# EAGLE board YaoGuai_SOUND (beta) (EAGLE 8.1.1)
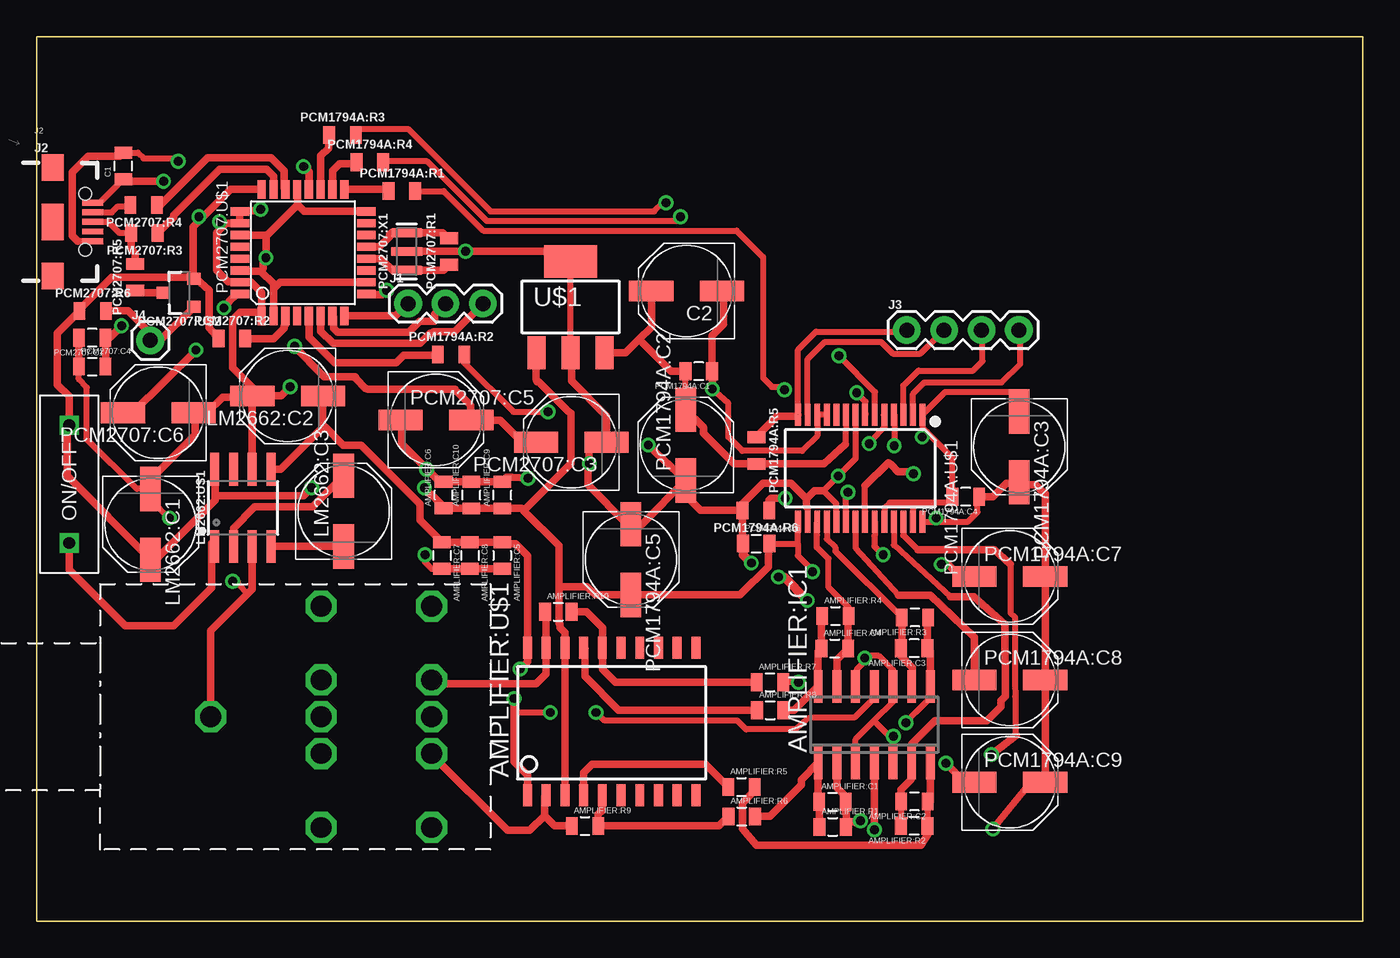
[diagram p0: board, top side]
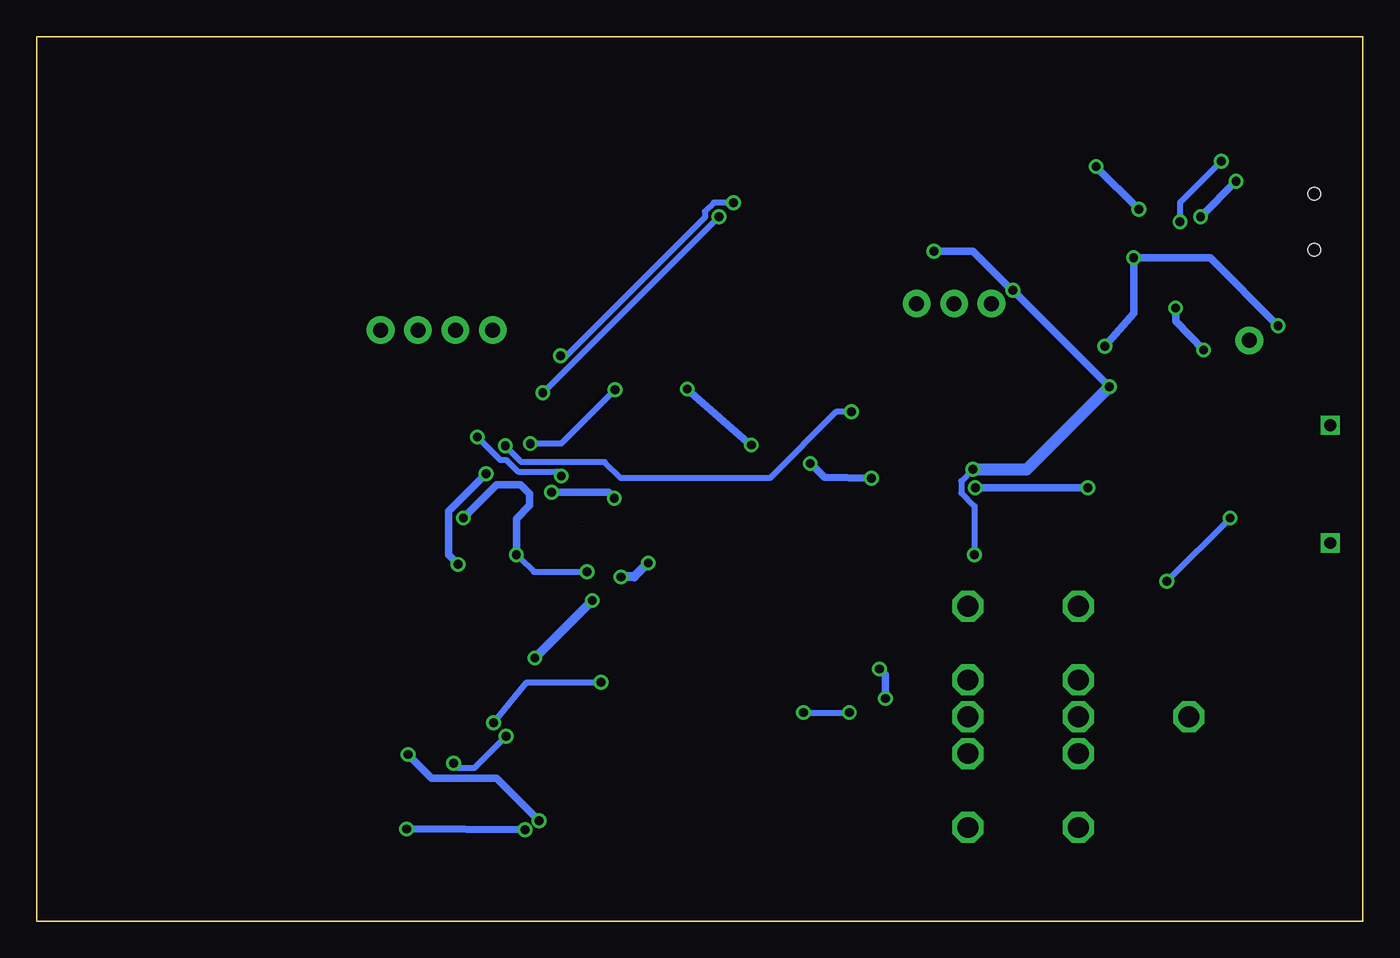
[diagram p1: board, bottom side, seen from below]

Size 90 x 60 mm. Coordinates in mm from the lower left corner, seen from the top.
Outline: 0.05,0 0,0 0,60 90,60 90,0 0.05,0
Copper layers (1*16): Top 0.035mm / dielectric 1.5mm / Bottom 0.035mm
Design rules "default *": minimum track width 10mil, minimum drill 24mil, track to track 8mil, track to pad 8mil, pad to pad 8mil, via to via 8mil, smd to smd 8mil, copper to edge 40mil, drill to drill 8mil, minimum pad ring 10mil, minimum via ring 8mil, stop-mask expansion 4mil, vias tented up to drill 0mil, thermal gap 10mil

## Footprints (pad centres in the part's own frame; a part is rotated, then mirrored left to right if it is on the bottom)
0805 = smd 0.8 x 1.2: 1 -0.9,0; 2 0.9,0
SO14 = smd 0.6 x 2.2: 1 -3.81,-2.6; 2 -2.54,-2.6; 3 -1.27,-2.6; 4 0,-2.6; 5 1.27,-2.6; 6 2.54,-2.6; 7 3.81,-2.6; 8 3.81,2.6; 9 2.54,2.6; 10 1.27,2.6; 11 0,2.6; 12 -1.27,2.6; 13 -2.54,2.6; 14 -3.81,2.6
SOIC20S = smd 0.6 x 1.5: 1 -5.715,-5; 2 -4.445,-5; 3 -3.175,-5; 4 -1.905,-5; 5 -0.635,-5; 6 0.635,-5; 7 1.905,-5; 8 3.175,-5; 9 4.445,-5; 10 5.715,-5; 11 5.715,5; 12 4.445,5; 13 3.175,5; 14 1.905,5; 15 0.635,5; 16 -0.635,5; 17 -1.905,5; 18 -3.175,5; 19 -4.445,5; 20 -5.715,5
TRS1/4"_6.35_SOCKET_JACK = drill 1.4 octagon: 1 -7.5,0; 2 0,-7.5; 3 7.5,-7.5; 4 0,0; 5 7.5,0; 6 0,-2.5; 7 0,2.5; 8 0,7.5; 9 7.5,7.5; 10 7.5,2.5; 11 7.5,-2.5
PANASONIC_D = smd 3 x 1.4: + 2.4,0; - -2.4,0
1X03 = drill 1.016 pad 1.88: 1 0,0; 2 2.54,0; 3 5.08,0
USB-AB-MICRO-SMD = smd 1.4 x 0.4: D+1 2.7,0; D-1 2.7,0.65; GND1 2.7,-1.3; ID1 2.7,-0.65; VBUS1 2.7,1.3 | smd 1.5 x 1.8: SHLD1 0,-3.68; SHLD2 0,3.68 | smd 1.5 x 2.5: SHLD3 0,0 | hole 0.85: 2.2,1.9; 2.2,-1.9
1X04 = drill 1.016 pad 1.88: 1 0,0; 2 2.54,0; 3 5.08,0; 4 7.62,0
1X01 = drill 1.016 pad 1.88: 1 0,0
SOIC-8 = smd 0.61 x 2.21: 1 -1.905,-2.616; 2 -0.635,-2.616; 3 0.635,-2.616; 4 1.905,-2.616; 5 1.905,2.616; 6 0.635,2.616; 7 -0.635,2.616; 8 -1.905,2.616
RED_SWITCH = drill 0.8 square: P$1 -4,0; P$2 4,0
SSOP28-0.65-10.2X5.2MM = smd 0.4 x 1.5: 1 -4.225,-3.625; 2 -3.575,-3.625; 3 -2.925,-3.625; 4 -2.275,-3.625; 5 -1.625,-3.625; 6 -0.975,-3.625; 7 -0.325,-3.625; 8 0.325,-3.625; 9 0.975,-3.625; 10 1.625,-3.625; 11 2.275,-3.625; 12 2.925,-3.625; 13 3.575,-3.625; 14 4.225,-3.625; 15 4.225,3.625; 16 3.575,3.625; 17 2.925,3.625; 18 2.275,3.625; 19 1.625,3.625; 20 0.975,3.625; 21 0.325,3.625; 22 -0.325,3.625; 23 -0.975,3.625; 24 -1.625,3.625; 25 -2.275,3.625; 26 -2.925,3.625; 27 -3.575,3.625; 28 -4.225,3.625
TQFP32-08 = smd 1.27 x 0.559: 1 -4.293,2.8; 2 -4.293,2; 3 -4.293,1.2; 4 -4.293,0.4; 5 -4.293,-0.4; 6 -4.293,-1.2; 7 -4.293,-2; 8 -4.293,-2.8; 17 4.293,-2.8; 18 4.293,-2; 19 4.293,-1.2; 20 4.293,-0.4; 21 4.293,0.4; 22 4.293,1.2; 23 4.293,2; 24 4.293,2.8 | smd 0.559 x 1.27: 9 -2.8,-4.293; 10 -2,-4.293; 11 -1.2,-4.293; 12 -0.4,-4.293; 13 0.4,-4.293; 14 1.2,-4.293; 15 2,-4.293; 16 2.8,-4.293; 25 2.8,4.293; 26 2,4.293; 27 1.2,4.293; 28 0.4,4.293; 29 -0.4,4.293; 30 -1.2,4.293; 31 -2,4.293; 32 -2.8,4.293
SOT23-3 = smd 0.8 x 0.9: 1 -0.95,-1; 2 0.95,-1; 3 0,1.1
RESONATOR-SMD-3.2X1.3 = smd 0.61 x 2.184: 1 -1.283,-0.006; 2 0,0; 3 1.27,-0.006
SOT223 = smd 1.219 x 2.235: 1 -2.311,-3.099; 2 0,-3.099; 3 2.311,-3.099 | smd 3.6 x 2.2: 4 0,3.099

## Placement (x,y rotation side)
AMPLIFIER:C1  2.7nF  [0805]  54.01,8.09 0 top
AMPLIFIER:C2  2.7nF  [0805]  59.57,8.11 180 top
AMPLIFIER:C3  2.7nF  [0805]  59.55,18.51 180 top
AMPLIFIER:C4  2.7nF  [0805]  54.17,18.49 0 top
AMPLIFIER:C5  0.1uF  [0805]  31.59,24.81 270 top
AMPLIFIER:C6  0.1uF  [0805]  27.61,28.91 90 top
AMPLIFIER:C7  0.1uF  [0805]  27.5,24.8 270 top
AMPLIFIER:C8  10uF  [0805]  29.4,24.8 270 top
AMPLIFIER:C9  0.1uF  [0805]  31.6,28.9 90 top
AMPLIFIER:C10  10uF  [0805]  29.5,28.9 90 top
AMPLIFIER:IC1  OPA4134D  [SO14]  56.85,13.33 0 top
AMPLIFIER:R1  1K  [0805]  54.03,6.39 0 top
AMPLIFIER:R2  1K  [0805]  59.55,6.46 180 top
AMPLIFIER:R3  1K  [0805]  59.61,20.6 180 top
AMPLIFIER:R4  1K  [0805]  54.21,20.7 0 top
AMPLIFIER:R5  1K  [0805]  47.83,9.1 0 top
AMPLIFIER:R6  1K  [0805]  47.85,7.1 0 top
AMPLIFIER:R7  1K  [0805]  49.77,16.2 0 top
AMPLIFIER:R8  1K  [0805]  49.79,14.3 0 top
AMPLIFIER:R9  1K  [0805]  37.21,6.45 0 top
AMPLIFIER:R10  1K  [0805]  35.39,20.99 0 top
AMPLIFIER:U$1  TPA6120A2  [SOIC20S]  39.02,13.55 0 top
AMPLIFIER:U$2  TRS_1/4"_6.35_SOCKET_JACK  [TRS1/4"_6.35_SOCKET_JACK]  19.3,13.86 0 top
C1  1.5uF  [0805]  5.87,51.24 90 top
C2  220uF  [PANASONIC_D]  44.11,42.75 180 top
J1  [1X03]  25.2,41.9 0 top
J2  [USB-AB-MICRO-SMD]  1.09,47.44 0 top
J3  [1X04]  59.05,40.1 0 top
J4  [1X01]  7.7,39.4 0 top
LM2662:C1  150nF  [PANASONIC_D]  7.72,26.92 270 top
LM2662:C2  47uF  [PANASONIC_D]  17.03,35.63 180 top
LM2662:C3  47uF  [PANASONIC_D]  20.83,27.81 90 top
LM2662:U$1  LM2662  [SOIC-8]  13.99,28.04 0 top
LM2662:U$2  RED_SWITCH_ON  [RED_SWITCH]  2.2,29.65 90 top
PCM1794A:C1  0.1uF  [0805]  44.93,37.31 180 top
PCM1794A:C2  10uF  [PANASONIC_D]  44.05,32.3 90 top
PCM1794A:C3  10uF  [PANASONIC_D]  66.69,32.18 270 top
PCM1794A:C4  0.1uF  [0805]  63.06,28.79 180 top
PCM1794A:C5  10uF  [PANASONIC_D]  40.33,24.53 270 top
PCM1794A:C6  0.1uF  [0805]  48.83,25.61 0 top
PCM1794A:C7  47uF  [PANASONIC_D]  66.05,23.39 0 top
PCM1794A:C8  47uF  [PANASONIC_D]  66.05,16.36 0 top
PCM1794A:C9  10uF  [PANASONIC_D]  66.05,9.42 0 top
PCM1794A:R1  27  [0805]  24.78,49.53 0 top
PCM1794A:R2  27  [0805]  28.12,38.44 0 top
PCM1794A:R3  27  [0805]  20.75,53.33 0 top
PCM1794A:R4  27  [0805]  22.6,51.49 0 top
PCM1794A:R5  27  [0805]  48.85,31.92 270 top
PCM1794A:R6  10K  [0805]  48.81,27.86 180 top
PCM1794A:U$1  PCM1794A  [SSOP28-0.65-10.2X5.2MM]  55.9,30.73 180 top
PCM2707:C1  1uF  [0805]  3.76,39.58 180 top
PCM2707:C3  0.1uF  [PANASONIC_D]  36.28,32.49 180 top
PCM2707:C4  1uF  [0805]  3.76,37.62 0 top
PCM2707:C5  10uF  [PANASONIC_D]  27.09,34.01 0 top
PCM2707:C6  10uF  [PANASONIC_D]  8.24,34.49 180 top
PCM2707:R1  1M  [0805]  27.98,45.44 90 top
PCM2707:R2  1M  [0805]  13.24,39.52 0 top
PCM2707:R3  22  [0805]  7.31,46.68 180 top
PCM2707:R4  22  [0805]  7.26,48.58 180 top
PCM2707:R5  1.5K  [0805]  6.68,43.69 90 top
PCM2707:R6  1M  [0805]  3.8,41.4 0 top
PCM2707:U$1  PCM2707  [TQFP32-08]  18.07,45.35 90 top
PCM2707:U$2  IRLML2246TRPBF  [SOT23-3]  9.67,42.63 90 top
PCM2707:X1  12MHz  [RESONATOR-SMD-3.2X1.3]  25.11,45.44 90 top
U$1  LM3940IMP-3.3/NOPB  [SOT223]  36.23,41.67 0 top

## Library data of the parts
AMPLIFIER:C1-AMPLIFIER:C10 AMPLIFIER:R1-AMPLIFIER:R10 C1 C2 LM2662:C1-LM2662:C3 PCM1794A:C1-PCM1794A:C9 PCM2707:C1 PCM2707:C3-PCM2707:C6 = SparkFun-Passives
AMPLIFIER:IC1 = linear
AMPLIFIER:U$1 AMPLIFIER:U$2 LM2662:U$1 LM2662:U$2 PCM1794A:U$1 PCM2707:U$1 PCM2707:U$2 U$1 = EduAreaLib
J1 J4 = SparkFun-Connectors
J2 = SparkFun-Connectors; PROD_ID: CONN-11794
J3 = SparkFun-Connectors; PROD_ID: CONN-09696
PCM1794A:R1-PCM1794A:R6 PCM2707:R1-PCM2707:R6 = SparkFun-Resistors
PCM2707:X1 = SparkFun-Clocks; PROD_ID: XTAL-08895

## Nets
3.3V: C2.+ PCM1794A:C1.2 PCM1794A:C2.+ PCM1794A:R5.2 PCM1794A:U$1.9 U$1.3
5V: AMPLIFIER:C6.1 AMPLIFIER:C9.1 AMPLIFIER:C10.1 AMPLIFIER:IC1.4 AMPLIFIER:U$1.3 AMPLIFIER:U$1.18 C1.1 J2.VBUS1 LM2662:C1.+ LM2662:U$1.8 LM2662:U$2.P$2 PCM1794A:C3.+ PCM1794A:C4.1 PCM1794A:C5.+ PCM1794A:C6.2 PCM1794A:C7.+ PCM1794A:C8.+ PCM1794A:C9.+ PCM1794A:U$1.15 PCM1794A:U$1.23 PCM1794A:U$1.28 PCM2707:R2.1 PCM2707:R6.1 PCM2707:U$1.24 PCM2707:U$2.2 U$1.1
AMPLIFIER:N$1: AMPLIFIER:C1.1 AMPLIFIER:IC1.1 AMPLIFIER:R1.1 AMPLIFIER:R6.2
AMPLIFIER:N$2: AMPLIFIER:R6.1 AMPLIFIER:R9.2 AMPLIFIER:U$1.5
AMPLIFIER:N$3: AMPLIFIER:R5.1 AMPLIFIER:U$1.4
AMPLIFIER:N$4: AMPLIFIER:C2.1 AMPLIFIER:IC1.7 AMPLIFIER:R2.1 AMPLIFIER:R5.2
AMPLIFIER:N$5: AMPLIFIER:R7.1 AMPLIFIER:R10.2 AMPLIFIER:U$1.16
AMPLIFIER:N$6: AMPLIFIER:R8.1 AMPLIFIER:U$1.17
AMPLIFIER:N$7: AMPLIFIER:C3.1 AMPLIFIER:IC1.8 AMPLIFIER:R3.1 AMPLIFIER:R7.2
AMPLIFIER:N$8: AMPLIFIER:R9.1 AMPLIFIER:U$1.2 AMPLIFIER:U$2.11
AMPLIFIER:N$9: AMPLIFIER:R10.1 AMPLIFIER:U$1.19 AMPLIFIER:U$2.10
AMPLIFIER:N$10: AMPLIFIER:C4.1 AMPLIFIER:IC1.14 AMPLIFIER:R4.1 AMPLIFIER:R8.2
GND: AMPLIFIER:C5.2 AMPLIFIER:C6.2 AMPLIFIER:C7.2 AMPLIFIER:C8.2 AMPLIFIER:C9.2 AMPLIFIER:C10.2 AMPLIFIER:IC1.3 AMPLIFIER:IC1.5 AMPLIFIER:IC1.10 AMPLIFIER:IC1.12 AMPLIFIER:U$2.1 C1.2 C2.- J2.GND1 LM2662:C1.- LM2662:C2.+ LM2662:U$1.3 LM2662:U$1.6 PCM1794A:C1.1 PCM1794A:C2.- PCM1794A:C3.- PCM1794A:C4.2 PCM1794A:C5.- PCM1794A:C6.1 PCM1794A:C9.- PCM1794A:R6.2 PCM1794A:U$1.1 PCM1794A:U$1.8 PCM1794A:U$1.11 PCM1794A:U$1.12 PCM1794A:U$1.16 PCM1794A:U$1.19 PCM1794A:U$1.24 PCM1794A:U$1.27 PCM2707:C1.2 PCM2707:C3.- PCM2707:C4.1 PCM2707:C5.- PCM2707:C6.- PCM2707:U$1.1 PCM2707:U$1.9 PCM2707:U$1.20 PCM2707:U$1.25 PCM2707:U$1.26 PCM2707:U$1.31 PCM2707:X1.2 U$1.2 U$1.4
LM2662:N$1: LM2662:C3.+ LM2662:U$1.2
LM2662:N$2: LM2662:C3.- LM2662:U$1.4
LM2662:N$3: LM2662:U$1.1 LM2662:U$2.P$1
N$1: J2.D-1 PCM2707:R4.2
N$2: J2.D+1 PCM2707:R3.2 PCM2707:R5.2
N$3: AMPLIFIER:C1.2 AMPLIFIER:IC1.2 AMPLIFIER:R1.2 PCM1794A:U$1.26
N$4: AMPLIFIER:C2.2 AMPLIFIER:IC1.6 AMPLIFIER:R2.2 PCM1794A:U$1.25
N$5: PCM1794A:R4.1 PCM2707:U$1.18
N$6: PCM1794A:R2.1 PCM2707:U$1.5
N$7: PCM1794A:R3.1 PCM2707:U$1.19
N$8: PCM1794A:R1.1 PCM2707:U$1.17
N$9: AMPLIFIER:C3.2 AMPLIFIER:IC1.9 AMPLIFIER:R3.2 PCM1794A:U$1.18
N$10: AMPLIFIER:C4.2 AMPLIFIER:IC1.13 AMPLIFIER:R4.2 PCM1794A:U$1.17
N$11: AMPLIFIER:C5.1 AMPLIFIER:C7.1 AMPLIFIER:C8.1 AMPLIFIER:IC1.11 AMPLIFIER:U$1.1 AMPLIFIER:U$1.20 LM2662:C2.- LM2662:U$1.5
N$12: J1.3 PCM2707:U$1.6
N$13: J1.2 PCM2707:U$1.7
N$14: J1.1 PCM2707:U$1.8
N$15: J3.4 PCM1794A:U$1.2
N$16: J3.3 PCM1794A:U$1.3
N$17: J3.2 PCM1794A:U$1.13
N$18: J3.1 PCM1794A:R5.1 PCM1794A:U$1.14
N$19: J4.1 PCM2707:R6.2 PCM2707:U$2.1
PCM1794A:N$1: PCM1794A:R4.2 PCM1794A:U$1.7
PCM1794A:N$2: PCM1794A:R3.2 PCM1794A:U$1.6
PCM1794A:N$3: PCM1794A:R1.2 PCM1794A:U$1.5
PCM1794A:N$4: PCM1794A:R6.1 PCM1794A:U$1.20
PCM1794A:N$5: PCM1794A:R2.2 PCM1794A:U$1.4
PCM1794A:N$9: PCM1794A:C7.- PCM1794A:U$1.22
PCM1794A:N$10: PCM1794A:C8.- PCM1794A:U$1.21
PCM2707:DIN: PCM2707:U$1.4
PCM2707:INTRNL_D+: PCM2707:R3.1 PCM2707:U$1.23
PCM2707:INTRNL_D-: PCM2707:R4.1 PCM2707:U$1.22
PCM2707:INTRNL_HOST: PCM2707:R2.2 PCM2707:U$1.3
PCM2707:N$9: PCM2707:R5.1 PCM2707:U$2.3
PCM2707:RESONATOR_XTI: PCM2707:R1.1 PCM2707:U$1.12 PCM2707:X1.1
PCM2707:RESONATOR_XTO: PCM2707:R1.2 PCM2707:U$1.13 PCM2707:X1.3
PCM2707:VCOM: PCM2707:C6.+ PCM2707:U$1.32
PCM2707:VDD: PCM2707:C1.1 PCM2707:C3.+ PCM2707:C4.2 PCM2707:C5.+ PCM2707:U$1.2 PCM2707:U$1.10 PCM2707:U$1.16 PCM2707:U$1.21 PCM2707:U$1.27 PCM2707:U$1.30

## Tracks (layer width: path | path; a pad name or v marks a point on that pad's centre or on a via)
3.3V
  Top 0.4: 54.9,32.35 54.9,33.24 54.92,33.41 PCM1794A:U$1.9 | PCM1794A:C2.+ 44.05,37.29 PCM1794A:C1.2
  Top 0.5: 54.9,32.35 53.42,31.02 PCM1794A:R5.2 47.33,31.02 45.25,33.1 45.25,33.5 PCM1794A:C2.+ | C2.+ 41.71,40.31 40.88,39.48 | 40.88,39.48 39.95,38.55 38.56,38.55 U$1.3 | PCM1794A:C1.2 43.04,37.31 40.88,39.48
5V  (via drill 0.6)
  Top 0.4: J2.VBUS1 4.27,48.74 C1.1 | PCM1794A:U$1.28 61.05,27.11 63.2,27.11 63.85,27.75 63.85,28.68 | v57.45,24.85 56.85,25.45 56.85,26.14 56.88,26.16 PCM1794A:U$1.23 | 52.7,23.7 v52.65,23.7
  Top 0.406: v52.65,23.7 52.65,23.8 51.65,24.8 51.65,25.6 | 51.65,25.6 51.65,27.08 PCM1794A:U$1.15 | PCM1794A:C6.2 51.64,25.61 51.65,25.6
  Top 0.5: PCM2707:U$2.2 10.55,43.7 5.1,43.7 2.9,41.5 PCM2707:R6.1 1.4,39.9 1.4,36.4 2.2,35.6 LM2662:U$2.P$2 2.05,33.5 2.05,30.2 LM2662:C1.+ 8.07,24.52 12.1,28.55 12.1,28.85 | 33.05,27.85 35.44,25.46 35.44,22.85 | 33.05,27.85 32.9,28 AMPLIFIER:C9.1 AMPLIFIER:C10.1 AMPLIFIER:C6.1 27.5,28.2 v26.3,29.4 | 35.44,22.85 35.44,20.2 35.5,20.14 35.5,19.9 35.84,19.55 AMPLIFIER:U$1.18 AMPLIFIER:U$1.3 | PCM2707:U$2.2 10.82,43.58 11.7,42.8 11.7,40.26 PCM2707:R2.1 | PCM2707:U$1.24 13.14,49.64 11.15,47.65 | 11.15,47.65 10.6,47.1 10.6,43.65 PCM2707:U$2.2 | v11,47.8 11.15,47.65 | 6.1,50.3 C1.1 6.01,50.2 v8.6,50.2 | 35.44,22.85 35.59,22.7 37.35,22.7 37.92,22.13 PCM1794A:C5.+ 47.73,22.13 49.65,24.05 49.65,25.53 PCM1794A:C6.2 | 12.1,28.85 12.1,30.64 LM2662:U$1.8 | 33.05,27.85 36.25,31.05 36.25,34.45 36.05,34.6 34.05,36.6 33.95,36.6 33.9,36.8 33.9,38.55 U$1.1 | 12.1,28.85 18.1,28.85 v18.65,29.4 | 63.85,28.68 PCM1794A:C4.1 64.89,28.79 65.8,29.7 66.61,29.7 PCM1794A:C3.+ 66.87,29.6 67.8,29.6 68.15,29.25 68.2,29.25 68.45,29 PCM1794A:C7.+ PCM1794A:C8.+ PCM1794A:C9.+ 68.25,9.4 67.45,9.4 v64.9,6.25 | v56.85,6.2 AMPLIFIER:IC1.4 | 57.45,24.7 v57.45,24.85 | v61.05,27.35 61.05,27.11
  Bottom 0.4: v52.65,23.7 56.25,23.7 57.25,24.7 v57.45,24.85
  Bottom 0.5: v11,47.8 v8.6,50.2 | v26.3,29.4 v18.65,29.4 | v64.9,6.25 v56.85,6.2 | v57.45,24.85 57.45,27.3 56.55,28.2 56.55,29 57.15,29.6 58.8,29.6 v61.05,27.35
AMPLIFIER:N$1
  Top 0.5: AMPLIFIER:R6.2 49.75,7.1 51.9,9.25 51.9,9.59 AMPLIFIER:IC1.1 53.04,8.16 AMPLIFIER:C1.1 53.11,6.76 AMPLIFIER:R1.1
AMPLIFIER:N$2
  Top 0.5: AMPLIFIER:U$1.5 38.35,8.52 38.35,7.5 38.11,7.26 AMPLIFIER:R9.2 46.3,6.45 AMPLIFIER:R6.1
AMPLIFIER:N$3
  Top 0.5: AMPLIFIER:U$1.4 37.12,10.06 37.7,10.65 45.38,10.65 AMPLIFIER:R5.1
AMPLIFIER:N$4
  Top 0.406: AMPLIFIER:C2.1 60.47,6.74 AMPLIFIER:R2.1
  Top 0.5: AMPLIFIER:C2.1 60.66,8.11 AMPLIFIER:IC1.7 | AMPLIFIER:R5.2 48.73,8.83 47.9,8 47.9,7.89 47.9,6.25 48.85,5.15 60,5.15 60.5,5.9 AMPLIFIER:R2.1
AMPLIFIER:N$5
  Top 0.5: AMPLIFIER:R10.2 37.3,21 38.38,19.91 AMPLIFIER:U$1.16 38.4,18.54 38.4,17.1 39.3,16.2 AMPLIFIER:R7.1
AMPLIFIER:N$6
  Top 0.5: AMPLIFIER:R8.1 39.5,14.3 37.2,16.6 37.2,18.46 AMPLIFIER:U$1.17
AMPLIFIER:N$7  (via drill 0.6)
  Top 0.406: v51.7,16.2 AMPLIFIER:R7.2 | v59,13.45 59.7,14.2 60.65,15.15 60.65,15.7 AMPLIFIER:IC1.8
  Top 0.5: AMPLIFIER:IC1.8 60.66,18.3 AMPLIFIER:C3.1 60.45,20.54 AMPLIFIER:R3.1
  Bottom 0.406: v51.7,16.2 56.75,16.2 v59,13.45
AMPLIFIER:N$8
  Top 0.5: AMPLIFIER:R9.1 35.15,6.45 34.45,7.15 | 34.45,7.15 34.45,8.43 AMPLIFIER:U$1.2 | AMPLIFIER:U$2.11 26.8,11.3 31.95,6.15 33.45,6.15 34.45,7.15
AMPLIFIER:N$9
  Top 0.5: AMPLIFIER:R10.1 34.58,20.91 AMPLIFIER:U$1.19 34.58,16.77 33.9,16.1 27.06,16.1 AMPLIFIER:U$2.10
AMPLIFIER:N$10
  Top 0.5: AMPLIFIER:R4.1 53.27,20.66 AMPLIFIER:C4.1 53.04,18.26 AMPLIFIER:IC1.14 51.41,14.3 AMPLIFIER:R8.2
GND  (via drill 0.6)
  Top 0.4: J2.GND1 2.76,46.14 | 52.33,28.05 PCM1794A:U$1.16 | PCM1794A:U$1.19 54.27,28.05 | 54.27,28.05 54.25,28.07 | 54.27,28.05 54.27,28.32 53.4,29.2 v54.4,30.2 55.58,31.38 PCM1794A:U$1.8 | U$1.2 U$1.4 | PCM1794A:U$1.11 PCM1794A:U$1.12 52.98,32.92 51.95,31.9 47.9,31.9 46.95,32.85 46.95,35.15 v45.85,36.1 | PCM1794A:C3.- 66.7,34.6 66.7,35.25 66.05,35.9 61.65,35.9 60.15,34.4 PCM1794A:U$1.1 60.1,34.15 60.15,34.1 60.15,33.45 60.42,33.17 | 59.55,28.4 62.1,28.4 62.15,28.45 62.15,28.75 PCM1794A:C4.2 62.15,28.95 62.15,31.45 60.42,33.17 | 59.55,28.4 57.9,28.4 57.55,28.05 57.55,27.15 PCM1794A:U$1.24 | 59.55,28.4 59.55,28.1 59.5,28.05 59.5,27.15 PCM1794A:U$1.27 | 60.42,33.17 v60.1,32.85
  Top 0.406: C1.2 6.1,52.15 6.85,52.15 7.25,51.75 9.55,51.75 v9.6,51.55 | v12.4,47.45 12.68,47.17 | 13.65,23.05 v13.3,23.05 13.7,22.85 14.32,22.23 | v9,27.35 7.7,28.65 7.7,29.1 LM2662:C1.- 6.78,29.32 3.4,32.7 3.4,36.2 2.85,36.75 2.85,38.14 2.86,38.15 | AMPLIFIER:C7.2 26.8,23.9 26.35,24.35 v26.35,24.85 | v26.45,30.65 26.48,30.68 | AMPLIFIER:IC1.3 55.58,12.33 56.83,13.57 | 56.83,13.57 58.2,14.95 58.2,15.85 AMPLIFIER:IC1.10 58.12,17.03 57.15,18 56.6,18 56.33,17.73 55.65,17.05 55.65,16 AMPLIFIER:IC1.12 | AMPLIFIER:IC1.5 58.12,12.28 57.98,12.43 | 57.98,12.43 56.83,13.57 | v58.15,12.55 58.1,12.55 57.98,12.43
  Top 0.5: PCM2707:C1.2 2.86,38.15 PCM2707:C4.1 | 2.76,46.14 2.4,46.5 2.4,50.8 3.5,51.9 5.63,51.9 C1.2 | AMPLIFIER:U$2.1 11.8,19.7 14.32,22.23 14.6,22.5 14.6,25.4 LM2662:U$1.3 | 18.4,51.2 v18.1,51.2 18.47,50.83 PCM2707:U$1.20 | v15.2,48.3 15.1,48.2 14,48.2 PCM2707:U$1.25 PCM2707:U$1.26 12.85,47.35 12.68,47.17 12.2,46.7 12.2,44.17 12.97,43.4 13.73,43.4 PCM2707:U$1.31 13.82,43.4 14.5,43.4 15.27,42.63 PCM2707:U$1.1 15.03,41.3 13.8,41.3 13.29,40.79 13.29,38.73 13.3,38.72 13.3,37.55 14.63,36.22 LM2662:C2.+ | LM2662:U$1.6 LM2662:C2.+ | PCM2707:X1.2 v29.1,45.44 | v29.1,45.44 35.56,45.44 U$1.4 | LM2662:C1.- 7.72,29.97 10.75,33 10.75,34.38 PCM2707:C6.- 11.54,34.49 12.6,35.55 14.55,35.55 LM2662:C2.+ | v33.35,30.05 32.25,30.1 31.9,30.1 AMPLIFIER:C9.2 AMPLIFIER:C10.2 AMPLIFIER:C6.2 27.34,29.81 26.48,30.68 24.75,32.4 24.75,33.95 PCM2707:C5.- | v17.2,36.25 16.6,35.65 14.85,35.65 LM2662:C2.+ | v23.75,42.8 23.45,42.5 23,42.5 22.95,42.55 PCM2707:U$1.9 | v29.1,45.45 v29.1,45.44 | 63.2,9.15 63.47,9.42 PCM1794A:C9.- 63.05,9.35 v61.7,10.7 | PCM1794A:C2.- 41.08,26.93 PCM1794A:C5.- 40.07,26.93 37.4,29.6 37.4,30.95 v37.5,31.05 37.5,32 38,32.5 38.65,32.5 PCM2707:C3.- 38.68,34.27 36.3,36.65 36.3,38.5 U$1.2 | PCM1794A:R6.2 45.04,27.86 43.95,28.95 43.95,29.8 PCM1794A:C2.- | PCM1794A:R6.2 47.91,25.63 PCM1794A:C6.1 | PCM1794A:R6.2 47.91,28.31 49.3,29.7 51.2,29.7 52.25,28.65 | 52.25,28.65 52.25,28.12 52.33,28.05 | AMPLIFIER:C7.2 AMPLIFIER:C8.2 AMPLIFIER:C5.2 | 53.4,29.2 52.8,29.2 52.25,28.65 | C2.- 46.6,42.66 46.6,40.5 45.83,39.73 PCM1794A:C1.1 45.85,37.1 v45.85,36.1 | PCM1794A:C2.- v41.5,32.3
  Top 0.6: v52.3,21.75 50.7,23.35 v50.35,23.35 | v56.2,17.85 56.33,17.73 | v48.5,24.3 47.95,24.85 47.95,25.4 PCM1794A:C6.1
  Bottom 0.4: v54.4,30.2 54.7,30.5 57.35,30.5 58.15,31.3 58.55,31.3 v60.1,32.85
  Bottom 0.406: v12.4,47.45 12.4,48.75 v9.6,51.55 | v9,27.35 v13.3,23.05 | v26.35,24.85 26.35,28.15 27.25,29.05 27.25,29.85 v26.45,30.65 | v58.15,12.55 60.3,10.4 61.4,10.4 v61.7,10.7
  Bottom 0.5: v15.2,48.3 v18.1,51.2 | v33.35,30.05 36.55,30.1 v37.5,31.05 | v17.2,36.25 v23.75,42.8 23.95,42.95 26.45,45.45 v29.1,45.45 | v41.5,32.3 41.5,32.25 v45.85,36.1
  Bottom 0.6: v56.2,17.85 v52.3,21.75 | v50.35,23.35 49.45,23.35 v48.5,24.3
  Bottom 0.8: v26.45,30.65 22.8,30.65 v17.2,36.25
LM2662:N$1
  Top 0.5: LM2662:U$1.2 13.36,26.66 14.8,28.1 18.72,28.1 LM2662:C3.+
LM2662:N$2
  Top 0.5: LM2662:U$1.4 20.82,25.42 LM2662:C3.-
LM2662:N$3
  Top 0.5: LM2662:U$1.1 11.86,25.65 11.86,22.61 9.3,20.05 6,20.05 2.2,23.85 LM2662:U$2.P$1
N$1
  Top 0.4: J2.D-1 5.09,48.09 5.5,48.5 6.28,48.5
  Top 0.5: 6.28,48.5 PCM2707:R4.2
N$2
  Top 0.4: J2.D+1 4.86,47.44 5.6,46.7 6.39,46.7
  Top 0.5: 6.39,46.7 PCM2707:R3.2 6.4,45.6 6.68,45.32 PCM2707:R5.2
N$3  (via drill 0.6)
  Top 0.4: PCM1794A:U$1.26 58.83,26.18 59.8,25.2
  Top 0.406: 66.1,24.2 66.1,20.9 66.4,20.6 66.4,16.15 66.41,15.25 66.41,12.69 66.5,12.6
  Top 0.5: AMPLIFIER:IC1.2 54.3,9.05 54.91,8.44 AMPLIFIER:C1.2 54.9,8.05 54.9,7.3 54.95,7.25 54.95,6.75 AMPLIFIER:R1.2 55.2,6.75 55.55,6.75 55.65,6.65 55.8,6.7 v55.9,6.8 | 59.8,25.2 65,25.2 66.1,24.2 | 66.5,12.6 65,11.45 v64.8,11.3
  Bottom 0.5: v55.9,6.8 58.8,9.7 63.2,9.7 v64.8,11.3
N$4
  Top 0.4: 62,22 58.2,25.5 58.17,25.52 PCM1794A:U$1.25
  Top 0.406: AMPLIFIER:C2.2 58.67,6.74 AMPLIFIER:R2.2
  Top 0.5: AMPLIFIER:C2.2 58.67,8.92 59.35,9.6 59.35,10.69 AMPLIFIER:IC1.6 59.39,12.04 60.95,13.6 64.5,13.6 65.45,14.55 65.45,14.95 65.75,15.25 65.7,20.15 63.6,22 62,22
N$5
  Top 0.5: PCM2707:U$1.18 20.07,50.92 20.55,51.4 21.61,51.4 PCM1794A:R4.1
N$6
  Top 0.5: PCM2707:U$1.5 18.47,39.63 20.2,37.9 24.4,37.9 24.9,38.4 26.98,38.4 PCM1794A:R2.1
N$7
  Top 0.5: PCM2707:U$1.19 19.27,51.92 19.8,52.45 19.8,53.28 PCM1794A:R3.1
N$8
  Top 0.5: PCM2707:U$1.17 23.77,49.64 PCM1794A:R1.1
N$9
  Top 0.4: PCM1794A:U$1.18 53.62,25.93 54.2,25.35 54.2,25.11 AMPLIFIER:R3.2
  Top 0.5: AMPLIFIER:R3.2 58.71,18.57 AMPLIFIER:C3.2 58.65,18 59.45,17.2 59.45,15.99 AMPLIFIER:IC1.9
N$10  (1 unrouted)
  Top 0.4: AMPLIFIER:R4.2 55.11,21.29 53.75,22.65 53.75,24.6 52.95,25.35 52.95,26.06 52.97,26.19 52.97,27.06 PCM1794A:U$1.17
  Top 0.5: AMPLIFIER:IC1.13 54.31,17.73 AMPLIFIER:C4.2 55.07,20.66 AMPLIFIER:R4.2
N$11  (via drill 0.6)
  Top 0.406: AMPLIFIER:IC1.11 56.85,15.15 55.5,13.8 52.5,13.8 52.3,13.75 51.5,13 48.15,13 47.55,13.6 38.55,13.6 38,14.15 v37.95,14.15 | v34.85,14.15 32.4,14.15
  Top 0.5: LM2662:U$1.5 16.56,30.66 19.4,33.5 | 19.4,33.5 19.4,35.6 LM2662:C2.- | 19.4,33.5 19.6,33.5 20.8,32.3 22,32.3 26,28.3 26,27.2 AMPLIFIER:C7.1 AMPLIFIER:C8.1 AMPLIFIER:C5.1 31.7,25.6 32.5,25.6 33.3,24.8 AMPLIFIER:U$1.20 33.3,18.4 33.3,17.6 v32.8,17.1 | v32.4,15.1 32.4,14.15 32.4,10.8 33.3,9.9 33.3,8.6 AMPLIFIER:U$1.1
  Bottom 0.406: v37.95,14.15 v34.85,14.15
  Bottom 0.5: v32.4,15.1 32.4,16.7 v32.8,17.1
N$12
  Top 0.5: PCM2707:U$1.6 19.27,40.03 20.1,39.2 26,39.2 26.7,39.9 26.84,39.9 26.93,39.99 28.37,39.99 J1.3
N$13
  Top 0.5: PCM2707:U$1.7 20.14,40.99 20.14,40.23 20.4,39.97 25.24,39.97 25.97,40.7 27,40.7 27,41.16 J1.2
N$14
  Top 0.5: PCM2707:U$1.8 24.36,41.06 J1.1
N$15
  Top 0.4: PCM1794A:U$1.2 59.48,35.77 60.25,36.55 65.5,36.55 66.75,37.8 66.75,40.02 J3.4
N$16
  Top 0.4: PCM1794A:U$1.3 58.83,36.33 59.85,37.35 63.55,37.35 64.2,38 64.2,40.03 J3.3
N$17
  Top 0.4: PCM1794A:U$1.13 52.33,38.12 53.5,39.3 57.3,39.3 58.1,38.5 59.99,38.5 J3.2
N$18  (1 unrouted)
  Top 0.4: PCM1794A:U$1.14 51.67,38.77 52.9,40 58.95,40 J3.1
  Top 0.5: PCM1794A:R5.1 48.85,32.85 50.25,34.25 51.57,34.25 PCM1794A:U$1.14
N$19
  Top 0.5: PCM2707:R6.2 6.2,41.4 7.7,39.9 J4.1 8.39,39.4 PCM2707:U$2.1
PCM1794A:N$1  (via drill 0.6)
  Top 0.406: PCM1794A:R4.2 23.5,51.55 26.5,51.55 30.55,47.5 43.4,47.5 v43.7,47.8 | v55.65,35.85 56.25,35.25 56.25,34.4 PCM1794A:U$1.7
  Bottom 0.406: v55.65,35.85 v43.7,47.8
PCM1794A:N$2  (via drill 0.6)
  Top 0.406: PCM1794A:R3.2 21.65,53.7 21.7,53.75 25.2,53.75 30.8,48.15 41.9,48.15 42.5,48.75 v42.7,48.75 | v54.45,38.35 56.9,35.9 56.88,35.88 PCM1794A:U$1.6
  Bottom 0.406: v54.45,38.35 54.05,38.35 44.65,47.75 44.65,48.15 44.05,48.75 v42.7,48.75
PCM1794A:N$3  (via drill 0.6)
  Top 0.406: PCM1794A:R1.2 27.62,49.53 30.3,46.85 47.5,46.85 49.3,45.05 49.3,36.85 49.9,36.25 50.75,36.25 | 50.75,36.25 50.77,36.1 | v56.5,32.4 56.65,32.4 56.65,32.6 57.55,33.5 57.55,34.3 57.5,34.35 PCM1794A:U$1.5 | v50.75,36.05 50.75,36.25
  Bottom 0.406: v56.5,32.4 54.4,32.4 v50.75,36.05
PCM1794A:N$4  (via drill 0.6)
  Top 0.4: PCM1794A:U$1.20 54.92,28.98
  Top 0.5: 55.25,29.1 v55.05,29.1 54.92,28.98 | v50.8,28.7 49.85,28.7 49.7,28.55 49.7,27.9 PCM1794A:R6.1
  Bottom 0.5: v55.05,29.1 51.2,29.1 v50.8,28.7
PCM1794A:N$5  (via drill 0.6)
  Top 0.4: v34.7,34.55 32.35,34.55 29,37.9 29,38.4 PCM1794A:R2.2 | v58.2,32.25 58.2,34.4 PCM1794A:U$1.4
  Bottom 0.4: v34.7,34.55 35.75,34.55 40.25,30.05 50.35,30.05 51.45,31.15 57.1,31.15 v58.2,32.25
PCM1794A:N$9  (via drill 0.6)
  Top 0.4: PCM1794A:U$1.22 56.23,29.52
  Top 0.5: 56.23,29.52 57.8,31.1 58,30.95 58.45,30.5 59.5,30.5 v59.5,30.35 | v61.4,24.2 61.85,24.2 62.65,23.4 PCM1794A:C7.-
  Bottom 0.5: v59.5,30.35 62.05,27.8 62.05,24.85 v61.4,24.2
PCM1794A:N$10
  Top 0.4: 58.49,22.1 55.58,25.31 PCM1794A:U$1.21
  Top 0.5: PCM1794A:C8.- 63.65,19.25 60.65,22.1 58.49,22.1
PCM2707:INTRNL_D+
  Top 0.5: PCM2707:U$1.23 16.07,50.53 15.6,51 12.4,51 9.3,47.9 9.3,47.77 PCM2707:R3.1
PCM2707:INTRNL_D-
  Top 0.5: PCM2707:R4.1 8.38,48.58 11.6,51.8 15.9,51.8 16.8,50.9 16.8,50.47 16.8,49.71 PCM2707:U$1.22
PCM2707:INTRNL_HOST
  Top 0.5: PCM2707:R2.2 16.09,39.52 16.8,40.23 16.8,40.4 16.9,40.5 16.9,41.03 PCM2707:U$1.3
PCM2707:N$9
  Top 0.5: PCM2707:U$2.3 6.84,42.63 PCM2707:R5.1
PCM2707:RESONATOR_XTI
  Top 0.5: PCM2707:U$1.12 23.4,44.95 23.45,44.9 23.45,44.85 24.14,44.16 PCM2707:X1.1 27.6,44.16 PCM2707:R1.1
PCM2707:RESONATOR_XTO
  Top 0.5: PCM2707:U$1.13 23.25,45.75 23.95,46.45 23.95,46.6 24.1,46.75 25.08,46.75 PCM2707:X1.3 27.55,46.7 27.91,46.34 PCM2707:R1.2
PCM2707:VCOM  (via drill 0.6)
  Top 0.5: v12.7,41.6 12.95,41.85 12.95,41.9 13.1,42.1 13.55,42.55 PCM2707:U$1.32 | v10.8,38.75 6.5,34.5 PCM2707:C6.+
  Bottom 0.5: v12.7,41.6 12.7,40.7 v10.8,38.75
PCM2707:VDD  (via drill 0.6)
  Top 0.5: PCM2707:C4.2 PCM2707:C1.1 4.9,39.55 v5.75,40.4 | 16.07,42.9 PCM2707:U$1.2 | 16.07,42.9 16.07,43.23 15.2,44.1 | 15.2,44.1 13.83,44.1 PCM2707:U$1.30 | 15.65,46.55 PCM2707:U$1.27 | 17.7,48.6 15.65,46.55 | 17.7,48.6 17.7,49.61 PCM2707:U$1.21 | PCM2707:U$1.16 18.15,48.15 17.7,48.6 | PCM2707:U$1.10 16.52,43.35 16.07,42.9 | 15.6,45 v15.55,45 | 15.2,44.1 15.35,44.3 15.35,44.75 15.4,44.8 v15.55,45 | v15.55,45 15.55,46.45 15.65,46.55 | v17.5,39 17.45,39 19.5,36.95 21.6,36.95 21.7,36.75 22.3,36.15 22.5,36.1 28.4,36.1 28.55,35.9 29.45,35 29.45,34.05 PCM2707:C5.+ 29.7,34 31.45,34 32.95,32.5 33.85,32.5 PCM2707:C3.+
  Bottom 0.5: v5.75,40.4 10.35,45 v15.55,45 15.55,41.25 v17.5,39